# Altium PCB half-bridge.PcbDoc
Units mm, origin at the board's own origin, x right, y up, seen from the top; angles counter-clockwise.
Board outline 60 x 76 mm, 2 copper layers (Top Layer, Bottom Layer), stack 1.57 mm thick; 17 components, 8 nets, 51 pads, 197 vias.
Unrouted connection lines stored in the file: 7.
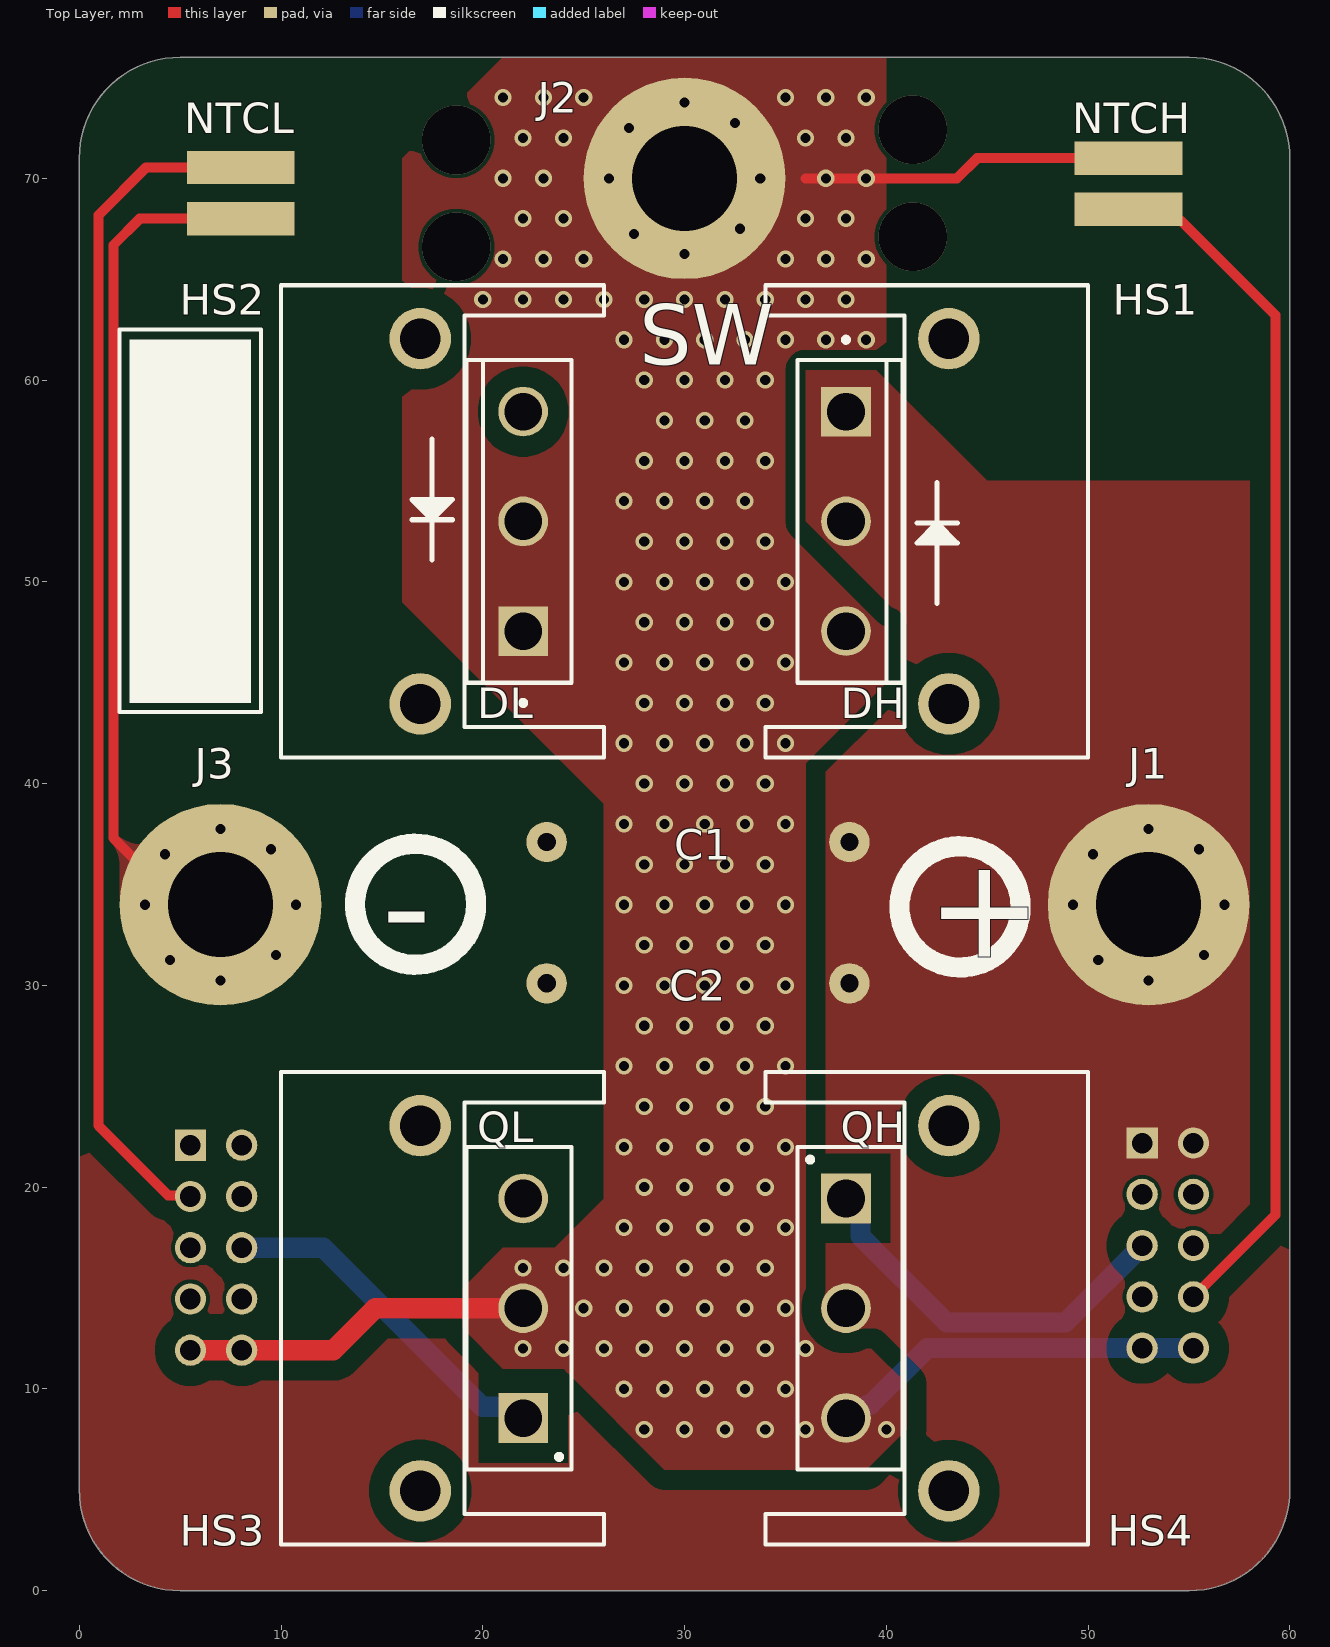
[diagram p0: Top Layer view]
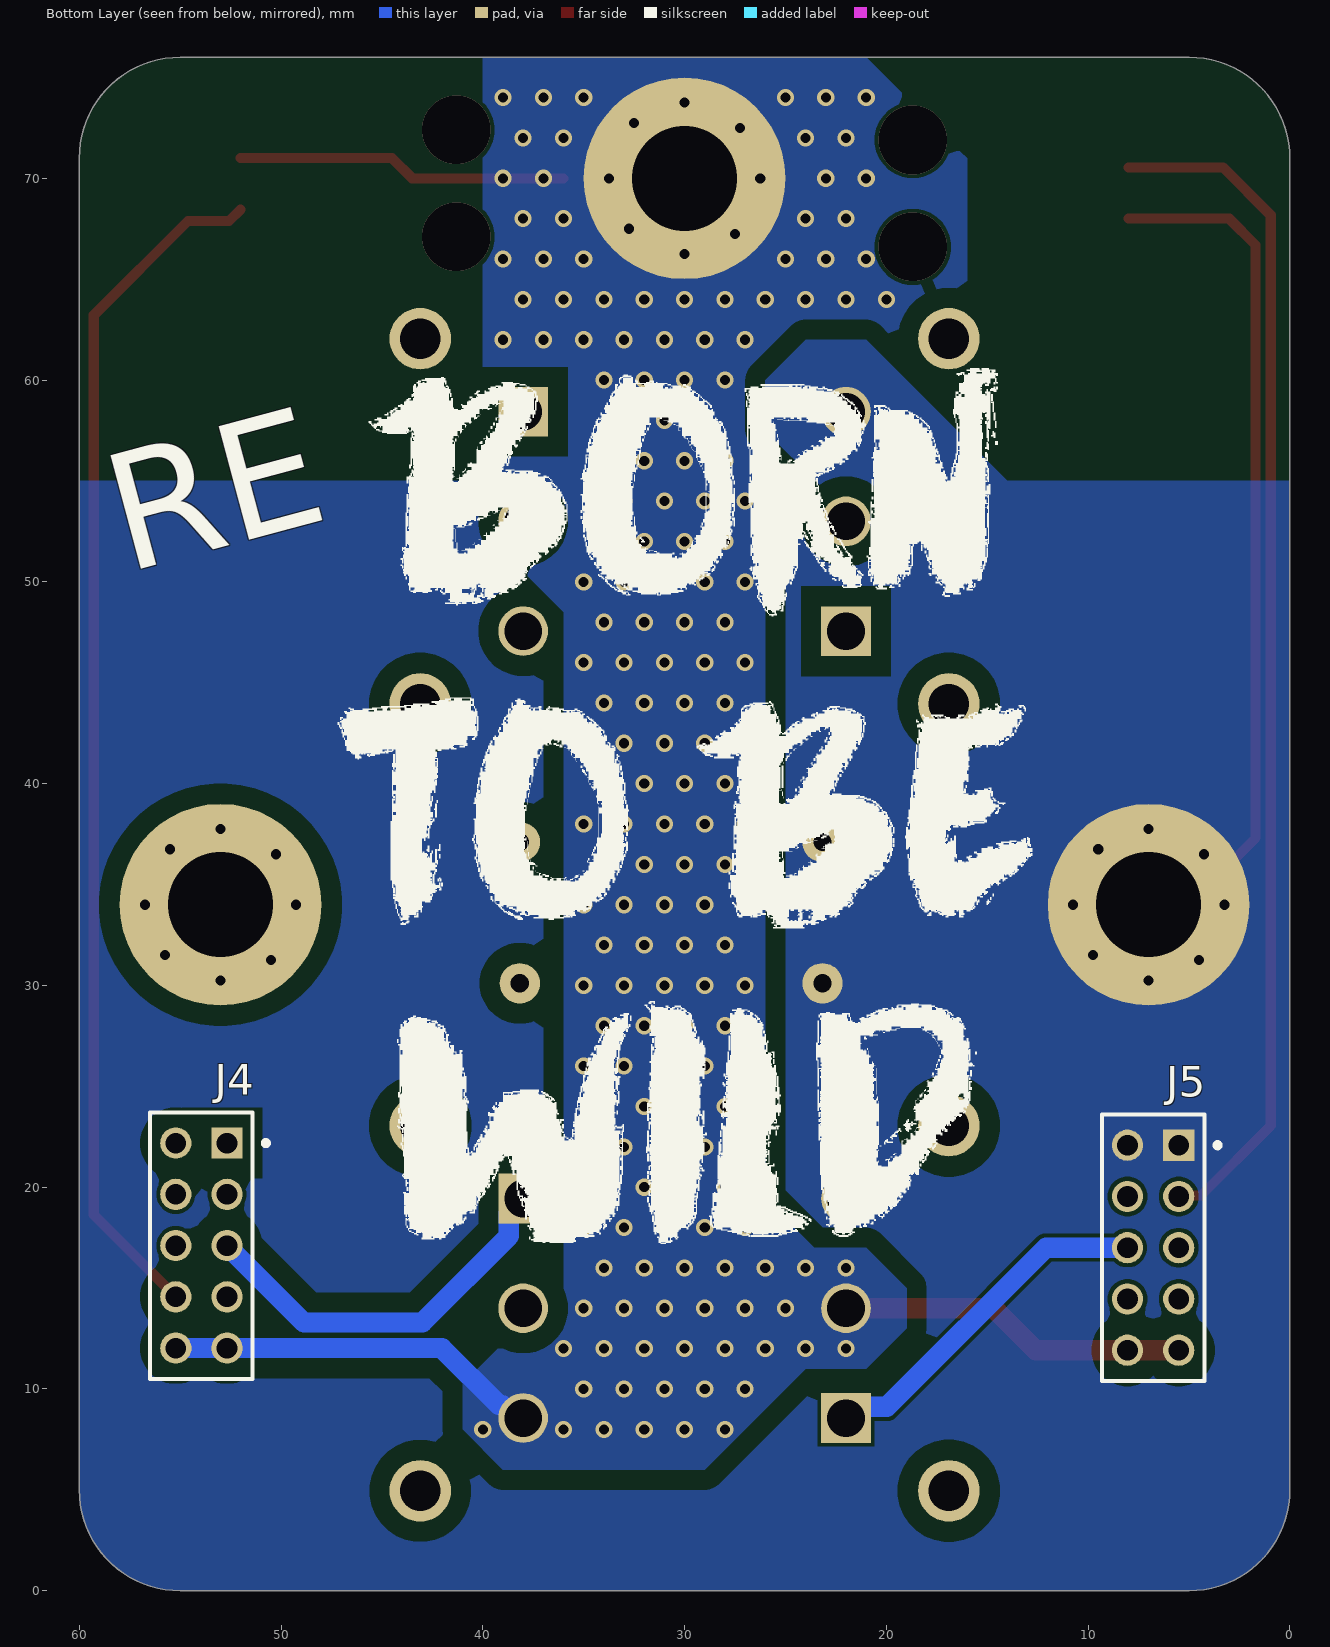
[diagram p1: Bottom Layer view, seen from below]
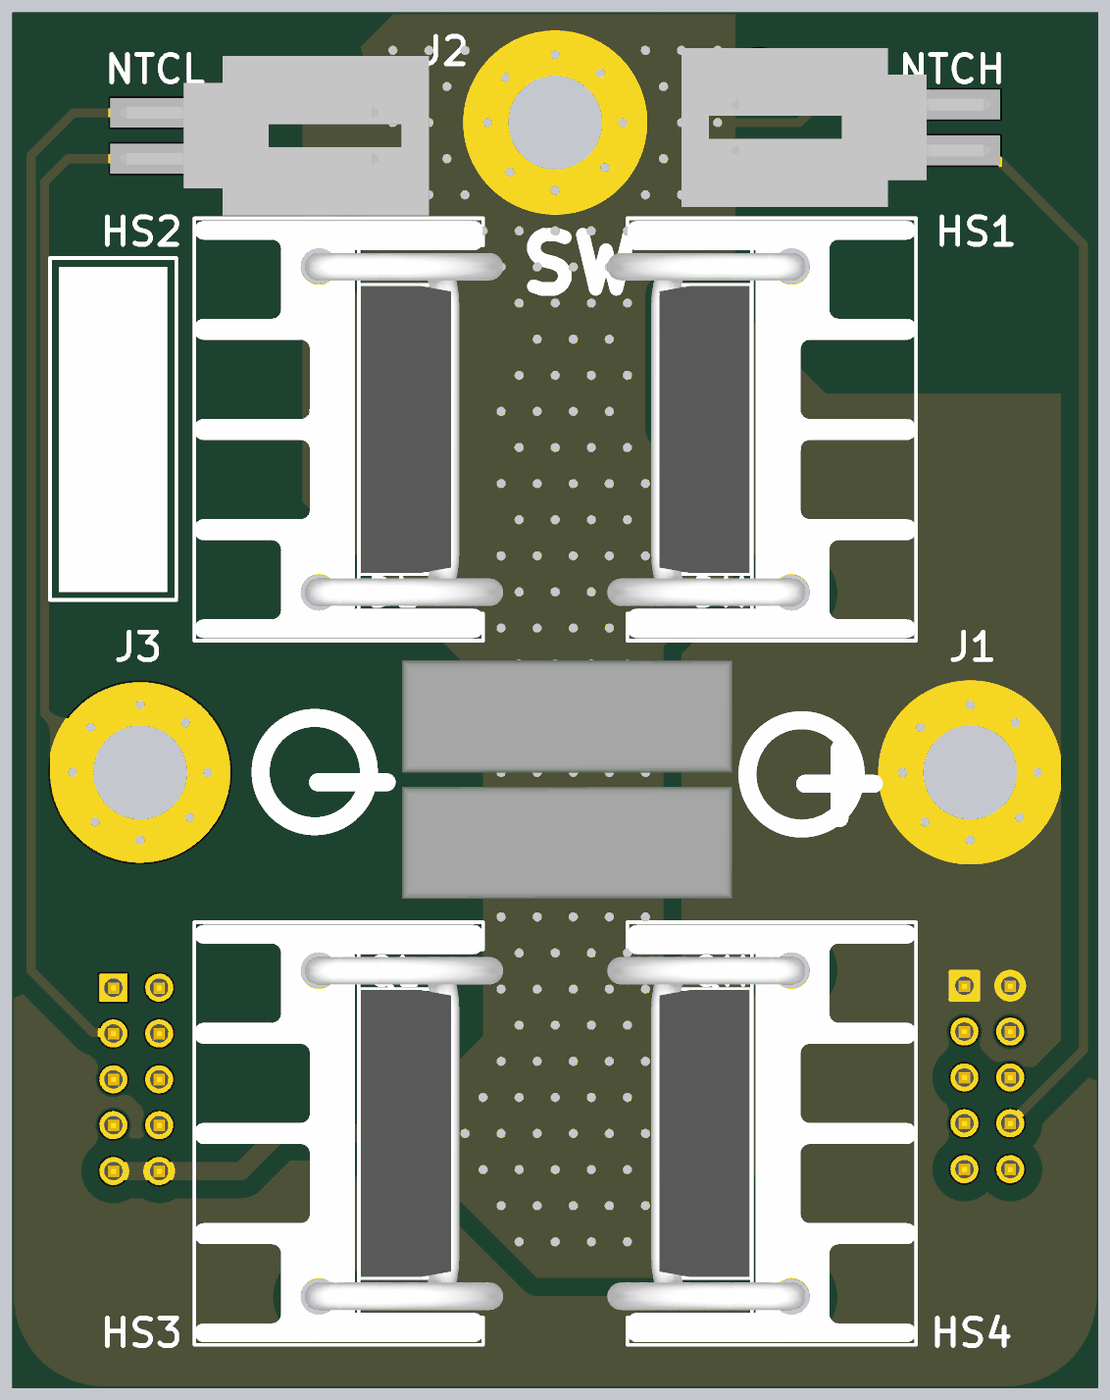
[diagram p2: 3D render of the assembled board from above, using the file's embedded part models]

## Layer stack, top to bottom
Top Solder: solder mask 0.01, Solder Resist, Dk 3.5
Top Layer: signal copper 0.035
Dielectric 1: dielectric 1.5, FR-4, Dk 4.8
Bottom Layer: signal copper 0.035
Bottom Solder: solder mask 0.01, Solder Resist, Dk 3.5

## Board outline
5,0 cw(c5,5) 0,5 0,71 cw(c5,71) 5,76 55,76 cw(c55,71) 60,71 60,5 cw(c55,5) 55,0

## Design rules (kind name [scope] priority, off if disabled: settings)
Clearance Clearance_HV [InNet('HV*') vs InNet('HV*')] p1: gap=1 ignorepadtopadclearanceinfootprint=FALSE
Clearance Clearance_HV_SW [InNet('HV*') vs InNet('SW')] p2: gap=1 ignorepadtopadclearanceinfootprint=FALSE
Clearance Clearance_GLS_SW [InNet('GATE_LS') vs InNet('SW')] p3: gap=1 ignorepadtopadclearanceinfootprint=FALSE
Clearance Clearance_NN [InNet('No Net')] p4: gap=1 ignorepadtopadclearanceinfootprint=FALSE
Clearance Clearance_HV_GATE [InNet('HV_PWR') vs InNet('GATE_*')] p5: gap=1 ignorepadtopadclearanceinfootprint=FALSE
Clearance Clearance_HV_TEMP [InNet('HV_PWR') vs InNet('*_TEMP')] p6: gap=1 ignorepadtopadclearanceinfootprint=FALSE
Clearance Clearance_HS_LS [InNet('*HS*') vs InNet('*LS*')] p7: gap=1 ignorepadtopadclearanceinfootprint=FALSE
Clearance Clearance_HV_GND_HS [InNet('HV_GND') vs InNet('*HS*')] p8: gap=1 ignorepadtopadclearanceinfootprint=FALSE
Clearance [All] p9: gap=0.2 ignorepadtopadclearanceinfootprint=FALSE
ComponentClearance [All] p1: gap=-10 collisioncheckmode=3 verticalgap=0.05 showdistances=FALSE
Height [All] p1: minheight=0 maxheight=228.6 prefheight=12.7
HoleSize [All] p1: absolutevalues=TRUE maxlimit=253.975 minlimit=0.025 maxpercent=80.000 minpercent=20.000
PolygonConnect [All] p1: connectstyle=Relief reliefconductorwidth=0.254 reliefentries=4 polygonreliefangle="90 Angle" airgapwidth=0.254
RoutingVias [All] p1: holewidth=0.711 width=1.27 viastyle="Through Hole" minholewidth=0.711 minwidth=1.27 maxholewidth=0.711 maxwidth=1.27
SolderMaskExpansion [All] p1: expansion=0.102 istentingtop=FALSE
SupplyNets "Schematic Supply Nets" [InNet('No Net')] p1: voltage=0.000
SupplyNets "Schematic Supply Nets_2" [InNet('HV_GND')] p2: voltage=0.000
SupplyNets "Schematic Supply Nets_1" [InNet('HV_PWR')] p3: voltage=0.000
Width [All] p1: maxlimit=5 minlimit=0.2 preferedwidth=1
27 further rules are at their usual default settings.

## Components (designator, comment, footprint, x,y, rotation, side; value= is the part's Value field where it differs from the comment)
C1 "330nF 10% 630V MKP RAD" "330nF 10% 630V MKP RAD-Footprint-1" 30.667,37.105 r0 top value=330nF
C2 "330nF 10% 630V MKP RAD" "330nF 10% 630V MKP RAD-Footprint-1" 30.667,30.105 r0 top value=330nF
DH "SD 1.2kV 7.9A TO-247" SSTO247-3-NCT 38,53 r270 top
DL "SD 1.2kV 7.9A TO-247" SSTO247-3-NCT 22,53 r90 top
HS1 "HS: WA-T247-101E" FP-WA-T247-101E-MFG 42,53 r180 top
HS2 "HS: WA-T247-101E" FP-WA-T247-101E-MFG 18,53 r0 top
HS3 "HS: WA-T247-101E" FP-WA-T247-101E-MFG 18,14 r0 top
HS4 "HS: WA-T247-101E" FP-WA-T247-101E-MFG 42,14 r180 top
J1 "CON1: M5 Generic Pad" "CON1: M5 Generic Pad-Footprint-1" 53,34 r0 top
J2 "CON1: M5 Generic Pad" "CON1: M5 Generic Pad-Footprint-1" 30,70 r0 top
J3 "CON1: M5 Generic Pad" "CON1: M5 Generic Pad-Footprint-1" 7,34 r0 top
J4 "CON10: MTSW-105-09-G-D-490" MTSW-105-09-G-D-490 53.947,17.105 r270 bottom
J5 "CON10: MTSW-105-09-G-D-490" MTSW-105-09-G-D-490 6.78,17 r270 bottom
NTCH "CON2: 171977-0002" "CON2: 171977-0002-Footprint-1" 52,71 r270 top
NTCL "CON2: 171977-0002" "CON2: 171977-0002-Footprint-1" 8,68 r90 top
QH "IGBT 650V 85A" TO247P159X260-3 38,14 r270 top
QL "IGBT 650V 85A" TO247P159X260-3 22,14 r90 top

## Footprints (in the part's own frame and the unit in brackets; to place one, negate y for a bottom-side part, rotate by r counter-clockwise, add the part's x,y. Pads: shape width x height; smd on the part's side, far side on the other; paste and mask are expansions set on the pad)
"330nF 10% 630V MKP RAD-Footprint-1" [mm]
  round 2 hole 0.9: 1(-7.5,0) 2(7.5,0)
  body extent -9.15,-3.11 9.15,3.1, height 12.1
"CON1: M5 Generic Pad-Footprint-1" [mm]
  round 10 hole 5.2: 1(0,0)
"CON2: 171977-0002-Footprint-1" [mm]
  rect 1.65x5.33 smd: 1(0,0) 2(2.54,0)
  body extent -3.14,-15 5.68,2.14, height 7.45
FP-WA-T247-101E-MFG [mm]
  round 3.05 hole 2 paste-2539.97 mask+0: 1(-1.1,9.05) 2(-1.1,-9.05)
  silkscreen extent -8,-11.7 8,11.7, body extent -8.1,-11.8 8.1,11.8, height 0.25
MTSW-105-09-G-D-490 [mm] "THD, 10-Leads, Body 13.2x5.08mm, Pitch 2.54mm"
  rect 1.55x1.55 hole 1.02: 1(-5.08,1.27)
  round 1.55 hole 1.02: 2(-5.08,-1.27) 3(-2.54,1.27) 4(-2.54,-1.27) 5(0,1.27) 6(0,-1.27) 7(2.54,1.27) 8(2.54,-1.27) 9(5.08,1.27) 10(5.08,-1.27)
  silkscreen extent -6.6,-2.54 6.6,3.32, body extent -6.33,-2.54 6.37,2.54, height 9.5
SSTO247-3-NCT [mm]
  round 2.46 hole 1.86 paste-2539.97 mask+0: 1(5.44,0) 2(0,0)
  rect 2.46x2.46 hole 1.86 paste-2539.97 mask+0: 3(-5.44,0)
  silkscreen extent -9.12,-2.4 8,5.51, body extent -7.95,-2.23 7.95,2.77, height 26
TO247P159X260-3 [mm] "TO247"
  rect 2.46x2.46 hole 1.86 paste-2539.97 mask+0: 1(-5.44,0)
  round 2.46 hole 1.86 paste-2539.97 mask+0: 2(0,0) 3(5.44,0)
  silkscreen extent -8,-2.4 8,2.8, body extent -7.95,-2.23 7.95,2.77, height 26

## Part data
C1 C2: library part CMP-001-00090-2, "Film Capacitor, Polypropylene, 630V, 10% +Tol, 10% -Tol, 0.33uF, Through Hole Mount", Case/Package=Radial, Dielectric Material=Polypropylene, ESR (Equivalent Series Resistance)=84mΩ, Manufacturer Part Number=R71PI333050H6K, Max Operating Temperature=125°C, Min Operating Temperature=-55°C, Ripple Current=2.06A, Voltage Rating (AC)=220V, Voltage Rating (DC)=630V, Contact Plating=Tin, Export Control Classification Number (ECCN) Code=EAR99, Harmonized Tariff Schedule (HTS) Code=8532.25.00.70, Height=12mm, Introduction Date=2021-07-15, Length=18mm, Lifecycle Status=Production, Number of Terminals=2, Packaging=Bulk, REACH SVHC=Yes, RoHS=Compliant, Terminal Pitch=15mm, Width=6mm
DH DL: library part CMP-004-00043-4, "L-series Gallium Oxide Schottky barrier diode from Novel Crystal Technology", Manufacturer="Novel Crystal Technology", Manufacturer Part Number=NCT-L, Design Item ID="SD 1.2kV 7.9A TO-247", Source=MasterLibrary_SCH.SchLib
HS1 HS2 HS3 HS4: library part CMP-001-00100-3, "Heatsink, TEH100 Restr Series, TEH70 Restr Series, TO-247, 11C/W, 43.4X23.4X32MM", Case/Package=TO-247, Color=Black, Manufacturer Part Number=WA-T247-101E, Natural Thermal Resistance=11°C/W, Thermal Resistance @ Forced Air Flow (100 LFM)=8°C/W, Country of Origin="Mainland China", Export Control Classification Number (ECCN) Code=EAR99, Harmonized Tariff Schedule (HTS) Code=8541.90.00.00, Height=30.5mm, Height Off Base=16.002mm, Introduction Date=2014-05-09, Length=23.1mm, Lifecycle Status=Production, Material=Aluminium, Mounting Technology="Through Hole", Package Cooled=TO-247, Packaging=Bulk, REACH SVHC=Yes, RoHS=Compliant, Shape="Fins, Rectangular", Type=Passive, Weight=12g, Width=16mm
J1 J2 J3: library part CMP-001-00093-2, "Generic M5 connector for power or mounting"
J4 J5: library part CMP-001-00096-1, "Pin Header, Board-to-Board, 2.54 mm, 2 Rows, 10 Contacts, Through Hole, MTSW Series", Manufacturer Lifecycle Status=PRODUCTION, Contact Material=Bronze, Contact Plating=Gold, Gender=Male, Lead Free="Lead Free", Lead Pitch=2.54mm, Lifecycle Status=Production, Mounting Technology="Through Hole", Number of Contacts=10, Number of Rows=2, Packaging=Bulk, Pitch=2.54mm, Radiation Hardening=No, RoHS=Compliant, Termination=Solder
NTCH NTCL: library part CMP-001-00095-2, "2.54MM Sl Header, Single, Right Angle, Shrouded, Surface Mount, Pegs, 2 Circuits Headers and Wire Housings 0,5527", Current Rating=3A, Dielectric Material="Liquid Crystal Polymer", Insulation Resistance=1GΩ, Manufacturer=Molex, Manufacturer Lifecycle Status=ACTIVE, Manufacturer Part Number=171977-0002, Max Operating Temperature=105°C, Min Operating Temperature=-40°C, Category="Headers and Wire Housings", China RoHS=Compliant, Contact Gender=Male, Contact Material=Brass, Country of Origin=US, Lifecycle Status=Production, Number of Circuits=2, Number of Pins=2, Number of Rows=1, Orientation="Right Angle", Plating Thickness=2.54µm, REACH SVHC=Yes, RoHS=Compliant, Schedule B="8536694040, 8536694040", Terminal Pitch=2.54mm
QH QL: library part CMP-309-000000-1, "650V, 85A, TO-247-3 Low VCE(sat) IGBT in TRENCHSTOP 5 technology", Case/Package=TO-247, Collector Emitter Breakdown Voltage=650V, Collector Emitter Saturation Voltage=1.35V, Continuous Collector Current=85A, Manufacturer=Infineon, Manufacturer Part Number=IGW30N65L5XKSA1, Max Junction Temperature (Tj)=175°C, Max Power Dissipation=227W, Min Operating Temperature=-40°C, Package Quantity=240, Switching Frequency=50Hz, Category=IGBTs, China RoHS=Compliant, Collector Emitter Voltage (VCEO)=650V, ComponentLink1Description=https://datasheet.octopart.com:443/IGW30N65L5XKSA1-Infineon-datasheet-180062104.pdf?src-supplier=IHS, ComponentLink1URL=https://datasheet.octopart.com:443/IGW30N65L5XKSA1-Infineon-datasheet-180062104.pdf?src-supplier=IHS, ComponentLink2Description=https://datasheet.octopart.com:443/IGW30N65L5XKSA1-Infineon-datasheet-62294543.pdf?src-supplier=IHS, ComponentLink2URL=https://datasheet.octopart.com:443/IGW30N65L5XKSA1-Infineon-datasheet-62294543.pdf?src-supplier=IHS, ComponentLink3Description=http://sigma.octopart.com:80/conflict_mineral_statement/Infineon-company-51.pdf?src-supplier=Compliance+Statements, ComponentLink3URL=http://sigma.octopart.com:80/conflict_mineral_statement/Infineon-company-51.pdf?src-supplier=Compliance+Statements, Design Item ID="IGBT 650V 85A", Element Configuration=Single, Export Control Classification Number (ECCN) Code=EAR99, Halogen Free="Halogen Free", Height=25.5mm, Introduction Date=2014-12-10, Lead Free="Lead Free", Lifecycle Status=Production, Max Collector Current=85A, Max Operating Temperature=175°C, Mounting Technology="Through Hole", Number of Elements=1, Number of Terminals=3, Pins=3, Power Dissipation=227W, Pricing="5=25,762, 25=21,124, 50=19,582, 125=18,296, 250=16,994 (DKK)", REACH SVHC=Yes, RoHS=Compliant, Schedule B=8541290080, Source=MasterLibrary_SCH.SchLib, Stock=190, Turn-Off Delay Time=308ns, Turn-On Delay Time=33ns

## Via types
v1: diameter 0.85, hole 0.5, Top Layer to Bottom Layer, tented both sides, 169 vias
v2: diameter 1, hole 0.5, Top Layer to Bottom Layer, 24 vias
v3: diameter 3.4, hole 3.4, Top Layer to Bottom Layer, 4 vias

## Nets (pads, with @x,y where several pads share a name; then routed paths per layer and width w, separated by ;. In a path a pad name is that pad's centre, name@x,y a point inside that pad or via, vN(x,y) a via of type N, cw(c..) or ccw(c..) an arc to the next point about the centre after c; other vN are vias at no path point)
GATE_HS: J4.5 QH.1 | length 19.5
  Bottom Layer w1: QH.1 38.715,18.725 38.715,17.573 42.993,13.295 48.867,13.295 J4.5
GATE_LS: J5.6 QL.1 | length 17.4
  Bottom Layer w1: J5.6 12.088,17 19.974,9.115 21.445,9.115 QL.1
HS_TEMP: J4.8 NTCH.2 | length 59.8
  Top Layer w0.5: NTCH.2 52.575,67.885 54.615,67.885 59.282,63.218 59.282,18.63 J4.8
HV_GND: C1.1 C2.1 DL.1 J3.1 J5.1 J5.2 NTCL.1 QL.3 | length 40.8
  Top Layer w0.5: J3.1@4.906,34.094 1.7,37.3 1.7,66.7 2.999,67.999 NTCL.1@8,67.999
  other v2: 7,30.25 4.5,31.25 9.75,31.5 3.25,34 10.75,34 4.25,36.5 9.5,36.75 7,37.75
HV_PWR: C1.2 C2.2 DH.2 DH.3 J1.1 J4.1 J4.2 QH.2
  other v2: 53,30.25 50.5,31.25 55.75,31.5 49.25,34 56.75,34 50.25,36.5 55.5,36.75 53,37.75
LS_TEMP: J5.3 NTCL.2 | length 59.2
  Top Layer w0.5: J5.3 5.457,19.593 4.407,19.593 0.95,23.05 0.95,68.175 3.317,70.543 NTCL.2@7.997,70.543
"No Net": HS1.1 HS1.2 HS2.1 HS2.2 HS3.1 HS3.2 HS4.1 HS4.2
SW: DH.1 DL.2 DL.3 J2.1 J4.9 J4.10 J5.9 J5.10 NTCH.1 QH.3 QL.2 | length 52.4
  Top Layer w0.5: 36,70 v1(37,70) v1(39,70) 43.5,70 44.5,71 NTCH.1
  Top Layer w1: J5.9 12.592,11.92 14.672,14 QL.2
  Bottom Layer w1: QH.3 38.395,8.56 39.045,9.21 39.21,9.21 42.025,12.025 J4.9 J4.10
  other v1: 28,8 30,8 32,8 34,8 36,8 40,8 27,10 29,10 31,10 33,10 35,10 22,12 24,12 26,12 28,12 30,12 32,12 34,12 36,12 25,14 27,14 29,14 31,14 33,14 35,14 22,16 24,16 26,16 28,16 30,16 32,16 34,16 27,18 29,18 31,18 33,18 35,18 28,20 30,20 32,20 34,20 27,22 29,22 31,22 33,22 35,22 28,24 30,24 32,24 34,24 27,26 29,26 31,26 33,26 35,26 28,28 30,28 32,28 34,28 27,30 29,30 31,30 33,30 35,30 28,32 30,32 32,32 34,32 27,34 29,34 31,34 33,34 35,34 28,36 30,36 32,36 34,36 27,38 29,38 31,38 33,38 35,38 28,40 30,40 32,40 34,40 27,42 29,42 31,42 33,42 35,42 28,44 30,44 32,44 34,44 27,46 29,46 31,46 33,46 35,46 28,48 30,48 32,48 34,48 27,50 29,50 31,50 33,50 35,50 28,52 30,52 32,52 34,52 27,54 29,54 31,54 33,54 28,56 30,56 32,56 34,56 29,58 31,58 33,58 28,60 30,60 32,60 34,60 27,62 29,62 31,62 33,62 35,62 37,62 39,62 20,64 22,64 24,64 26,64 28,64 30,64 32,64 34,64 36,64 38,64 21,66 23,66 25,66 35,66 37,66 39,66 22,68 24,68 36,68 38,68 21,70 23,70 22,72 24,72 36,72 38,72 21,74 23,74 25,74 35,74 37,74 39,74
  other v2: 30,66.25 27.5,67.25 32.75,67.5 26.25,70 33.75,70 27.25,72.5 32.5,72.75 30,73.75
pads on no net: J4.3 J4.4 J4.6 J4.7 J5.4 J5.5 J5.7 J5.8
copper on no net:
  other v3: 18.69,66.6 41.31,67.1 18.69,71.9 41.31,72.4

## Polygon pours and split planes (outlines as drawn)
HV_GND on Top Layer "HV_GND_L01_P029" (solid, pour order 29): 1.61,37.037 cw(c0.668,36.095) 2,36.095 2,34 4.5,36.5 ccw(c3.293,35.293) 3.293,37 3,37 cw(c3,38.552) 1.903,37.454 1.778,37.579
HV_PWR on Top Layer "HV_PWR_L01_P022" (solid, pour order 22): 36,60.5 39.509,60.5 45.009,55 44.974,54.966 44.974,48.739 40.261,48.739 36,53
HV_PWR on Top Layer "Top Layer-HV_PWR" (solid, remove dead copper, pour order 26): 55,0 ccw(c55,5) 60,5 60,55 0,55 0,5 ccw(c5,5) 5,0
SW on Top Layer "SW_L01_P023" (solid, remove dead copper, pour order 23): 36,14 38,12 39.256,12 41,10.256 41,8 39,6 29,6 24,11 21,11 19,13 19,15 21,17 23.574,17 26,19.426 26,39 16,49 16,71 21,76 40,76 40,45 36,41
HV_GND on Bottom Layer "HV_GND_L02_P019" (solid, pour order 19): 13.5,54.5 21,62 24,62 26,60 26,57.5 23,54.5
SW on Bottom Layer "SW_L02_P021" (solid, remove dead copper, pour order 21): 36,14 38,12 39.256,12 41,10.256 41,8 39,6 29,6 24,11 21,11 19,13 19,15 21,17 23.574,17 26,19.426 26,52.5 16,62.5 16,71 21,76 40,76 40,52.5 36,48.5
HV_GND on Bottom Layer "Bottom Layer-HV_GND" (solid, remove dead copper, pour order 28): 0,5 ccw(c5,5) 5,0 55,0 ccw(c55,5) 60,5 60,55 0,55

## Silkscreen, mask and mechanical layers (free items; w line width, h text height)
Top Overlay:
  circle w1: c43.653,33.894 r3
  circle w1: c16.669,34.021 r3
  rectangle: 2.5,44 8.5,62
  lines w0.2: 2,43.554 9,43.554 9,62.5 2,62.5 2,43.554
  text "SW" at 27.75,60.75 h3
  text "-" at 15,31.501 h5
  text "+" at 42,31.417 h5
Bottom Overlay:
  drawing of 262 lines, arcs and shapes, not listed
  text "RE" at 57.199,48.589 h10 r345
Mechanical 1:
  lines w0.2: 4.08,22.08 5.51,22.08 ; 5.51,20.51 5.51,22.08 ; 5.51,23.51 5.51,22.08 ; 5.57,34 7,34 ; 6.92,22.08 5.51,22.08 ; 7,32.43 7,34 ; 7,35.43 7,34 ; 8.41,34 7,34 ; 28.57,70 30,70 ; 30,68.43 30,70 ; 30,71.43 30,70 ; 31.41,70 30,70 ; 51.247,22.185 52.677,22.185 ; 51.57,34 53,34 ; 52.677,20.615 52.677,22.185 ; 52.677,23.615 52.677,22.185 ; 53,32.43 53,34 ; 53,35.43 53,34 ; 54.087,22.185 52.677,22.185 ; 54.41,34 53,34 ; 0,5 ccw(c5,5) 5,0 55,0 ccw(c55,5) 60,5 60,71 ccw(c55,71) 55,76 5,76 ccw(c5,71) 0,71 0,5
Board:
  the board outline again, w0.2